# EAGLE board rain_sensor (EAGLE 8.4.1)
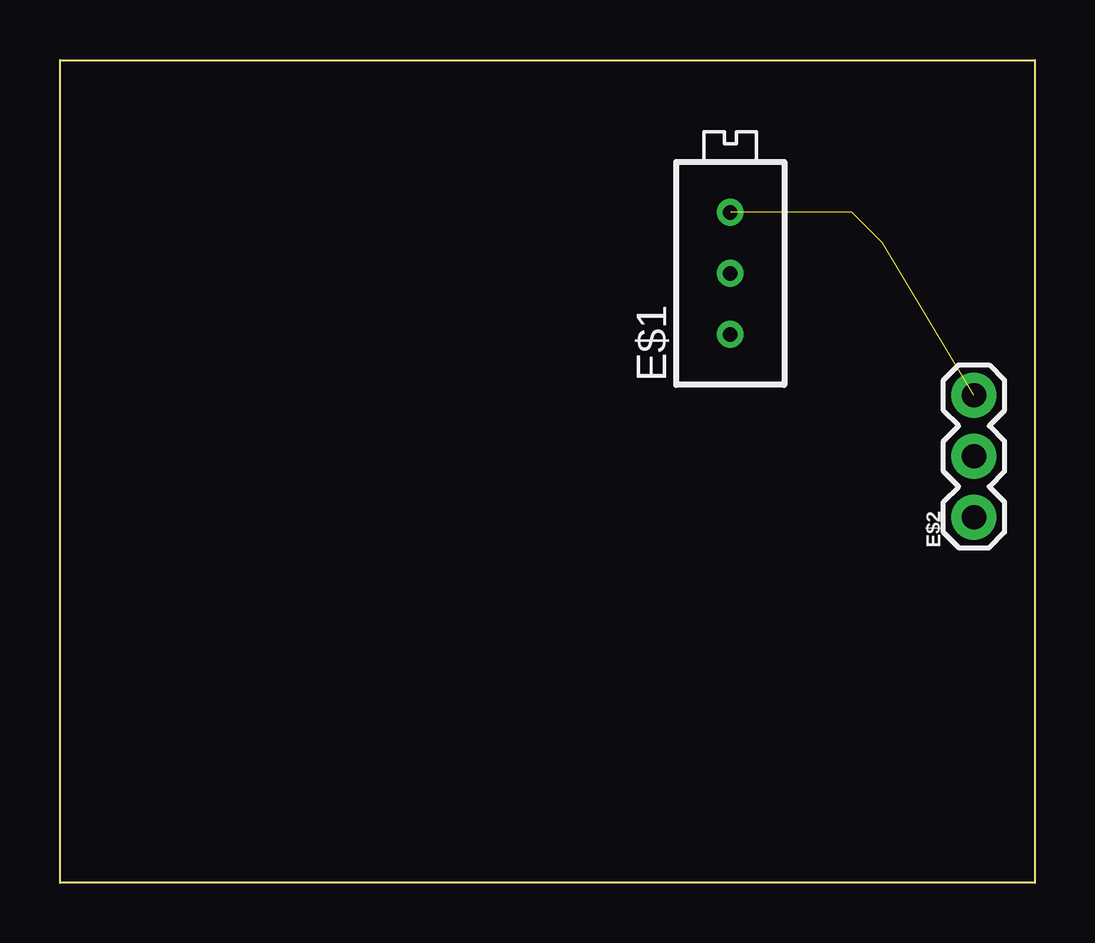
[diagram p0: board, top side]
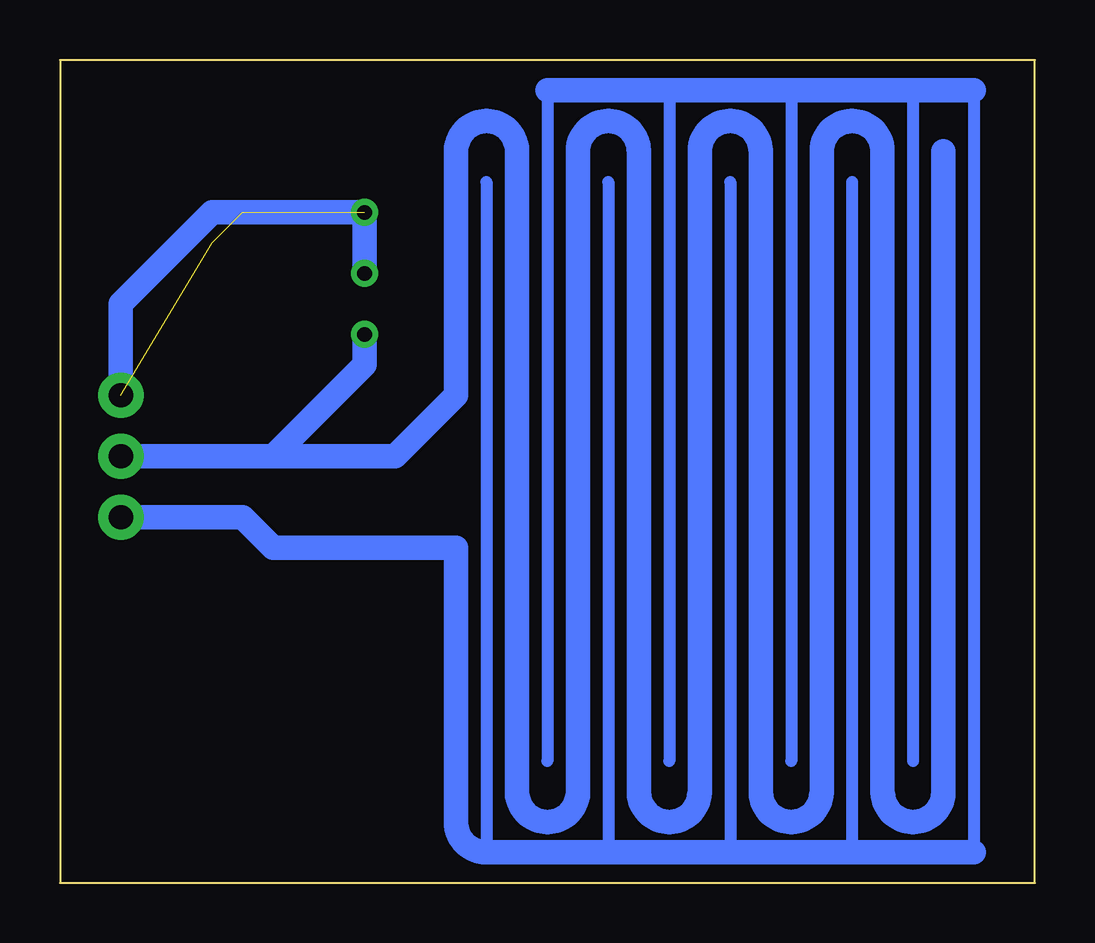
[diagram p1: board, bottom side, seen from below]

Size 40.64 x 34.29 mm. Coordinates in mm from the lower left corner, seen from the top.
Outline: 0,34.29 40.64,34.29 40.64,0 0,0 0,34.29
Copper layers (1*16): Top 0.035mm / dielectric 1.5mm / Bottom 0.035mm
Design rules "default": minimum track width 6mil, minimum drill 0.35mm, track to track 6mil, track to pad 6mil, pad to pad 6mil, via to via 6mil, smd to smd 6mil, copper to edge 40mil, drill to drill 6mil, minimum pad ring 10mil, minimum via ring 8mil, stop-mask expansion 4mil, vias tented up to drill 0mil, thermal gap 10mil

## Footprints (pad centres in the part's own frame; a part is rotated, then mirrored left to right if it is on the bottom)
RTRIM3296X = drill 0.61: 1 0,-2.54; 2 0,0; 3 0,2.54
1X03 = drill 1.016 pad 1.88: 1 0,0; 2 2.54,0; 3 5.08,0

## Placement (x,y rotation side)
E$1  [RTRIM3296X]  27.94,25.4 0 top
E$2  [1X03]  38.1,15.24 90 top

## Library data of the parts
E$1 = rcl
E$2 = SparkFun-Electromechanical

## Nets
S$1: E$1.1 E$2.2
S$2: E$2.1
S$3: E$1.2 E$1.3 E$2.3

## Tracks (layer width: path | path; a pad name or v marks a point on that pad's centre or on a via)
S$1
  Bottom 1.016: 3.81,30.48 3.81,3.81 arc180 6.35,3.81 6.35,30.48 arc-180 8.89,30.48 8.89,3.81 arc180 11.43,3.81 11.43,30.48 arc-180 13.97,30.48 13.97,3.81 arc180 16.51,3.81 16.51,30.48 arc-180 19.05,30.48 19.05,3.81 arc180 21.59,3.81 21.59,30.48 arc-180 24.13,30.48 24.13,20.32 26.67,17.78 31.75,17.78 | 31.75,17.78 E$2.2 | E$1.1 27.94,21.59 31.75,17.78
S$2
  Bottom 0.508: 5.08,33.02 2.54,33.02 2.54,1.27 7.62,1.27 | 5.08,33.02 5.08,5.08 | 5.08,33.02 10.16,33.02 | 10.16,33.02 10.16,5.08 | 10.16,33.02 15.24,33.02 | 15.24,33.02 15.24,5.08 | 15.24,33.02 19.05,33.02 | 20.32,33.02 20.32,5.08 | 7.62,29.21 7.62,1.27 | 7.62,1.27 12.7,1.27 | 12.7,29.21 12.7,1.27 | 12.7,1.27 17.78,1.27 | 17.78,29.21 17.78,1.27 | 17.78,1.27 22.86,1.27 22.86,29.21
  Bottom 1.016: 2.54,33.02 19.05,33.02 20.32,33.02 | 2.54,1.27 22.86,1.27 arc90 24.13,2.54 24.13,13.97 31.75,13.97 33.02,15.24 E$2.1
S$3  (3 unrouted)
  Bottom 1.016: E$1.2 E$1.3 34.29,27.94 38.1,24.13 E$2.3